# Altium PCB Atomizer_medical.PCBDOC
Units mil, origin at the board's own origin, x right, y up, seen from the top; angles counter-clockwise.
Board outline 984.71 x 2243.02 mil, 4 copper layers (Top, Inner Layer 2, Inner Layer 3, Bottom), stack 35.4 mil thick; 118 components, 59 nets, 280 pads, 170 vias.
Unrouted connection lines stored in the file: 55.
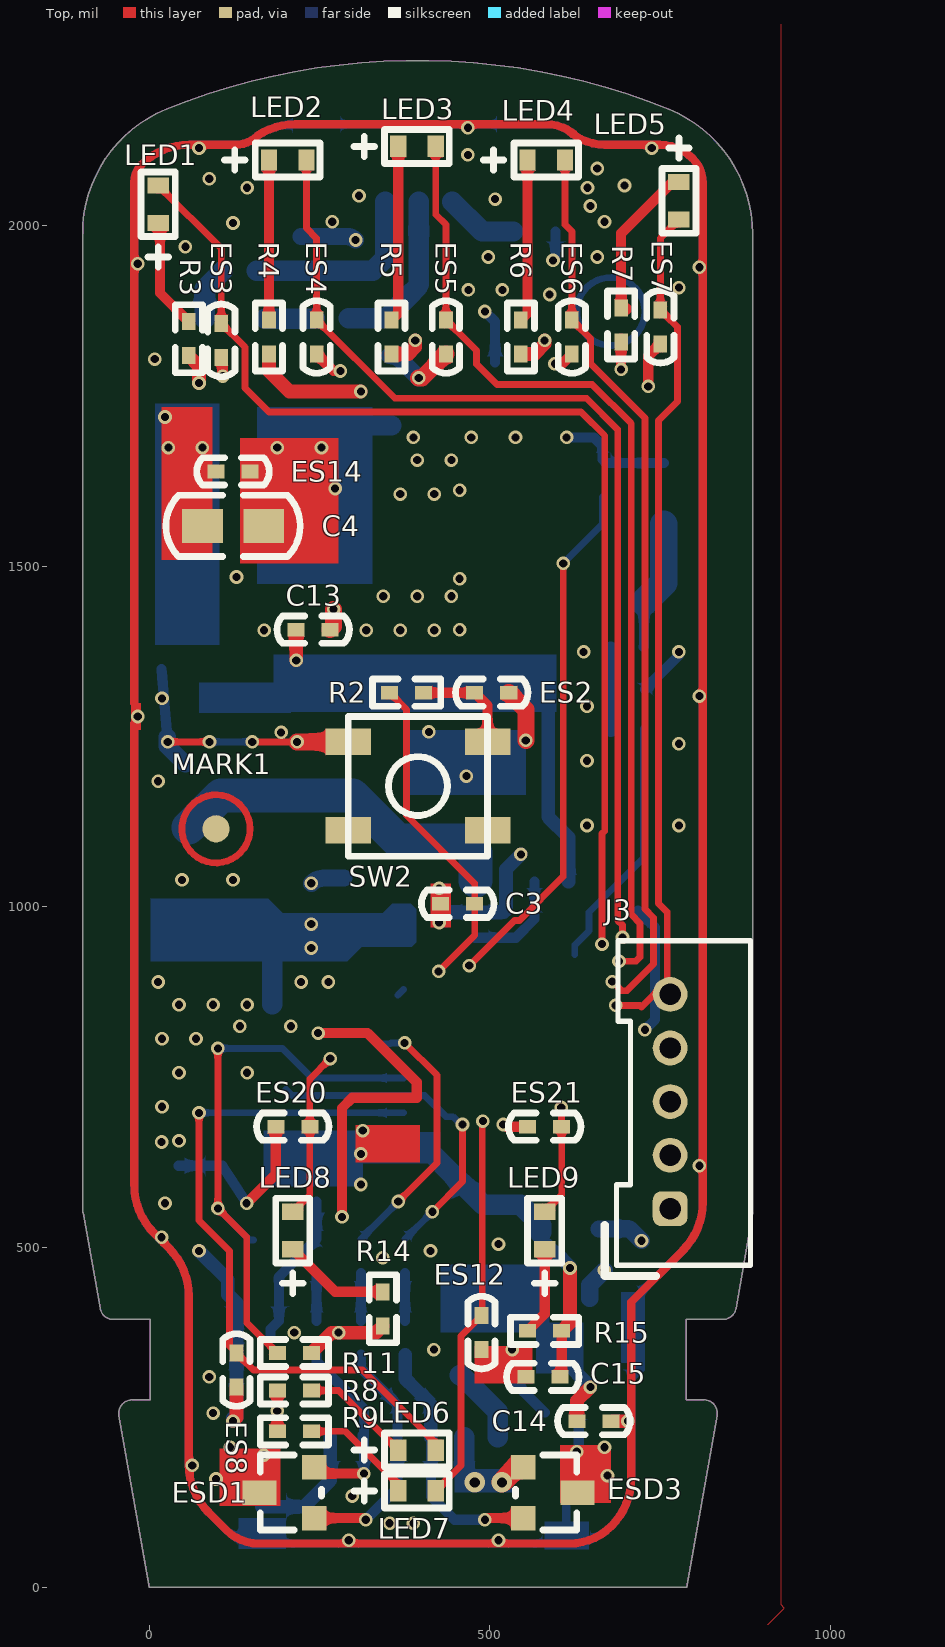
[diagram p0: Top view]
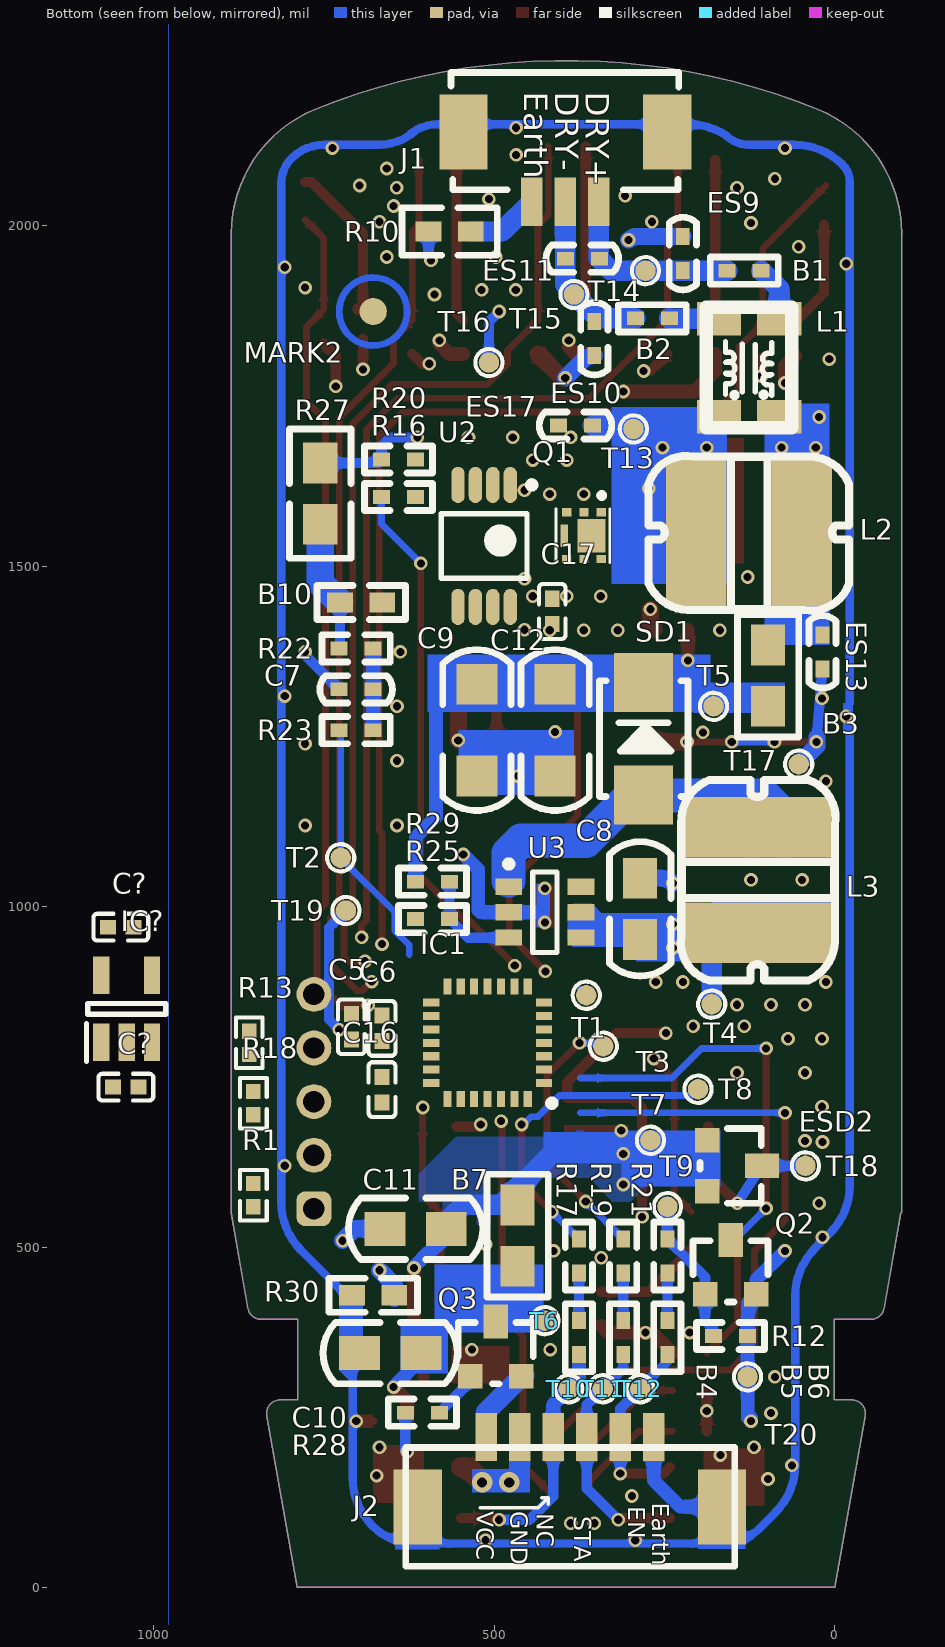
[diagram p1: Bottom view, seen from below]
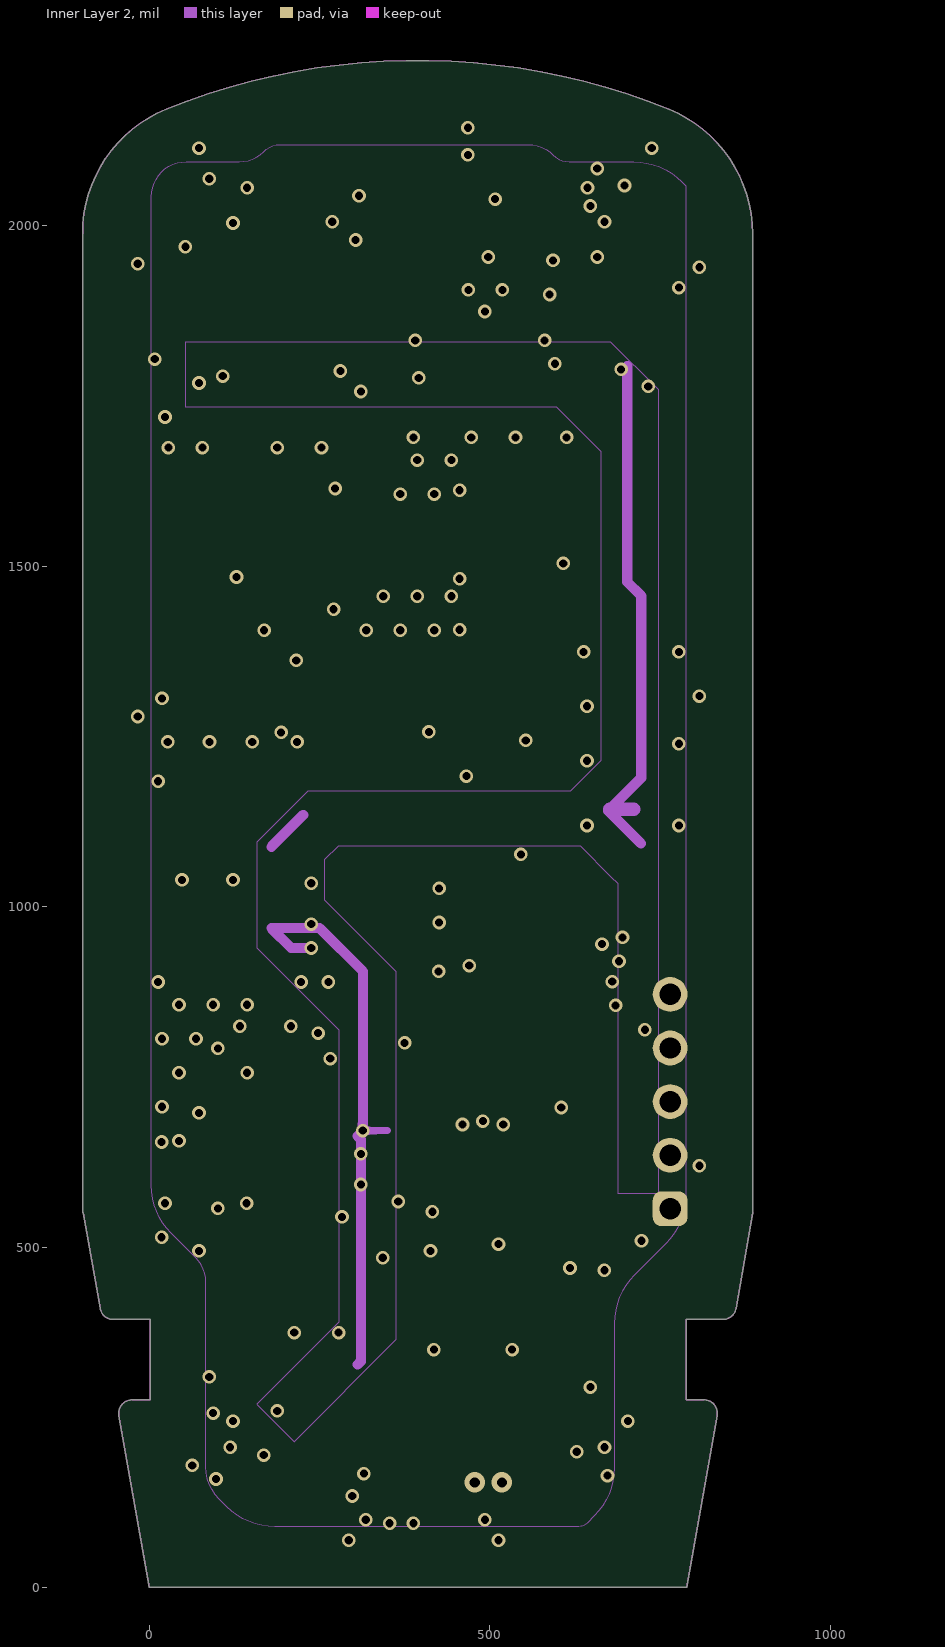
[diagram p2: Inner Layer 2]
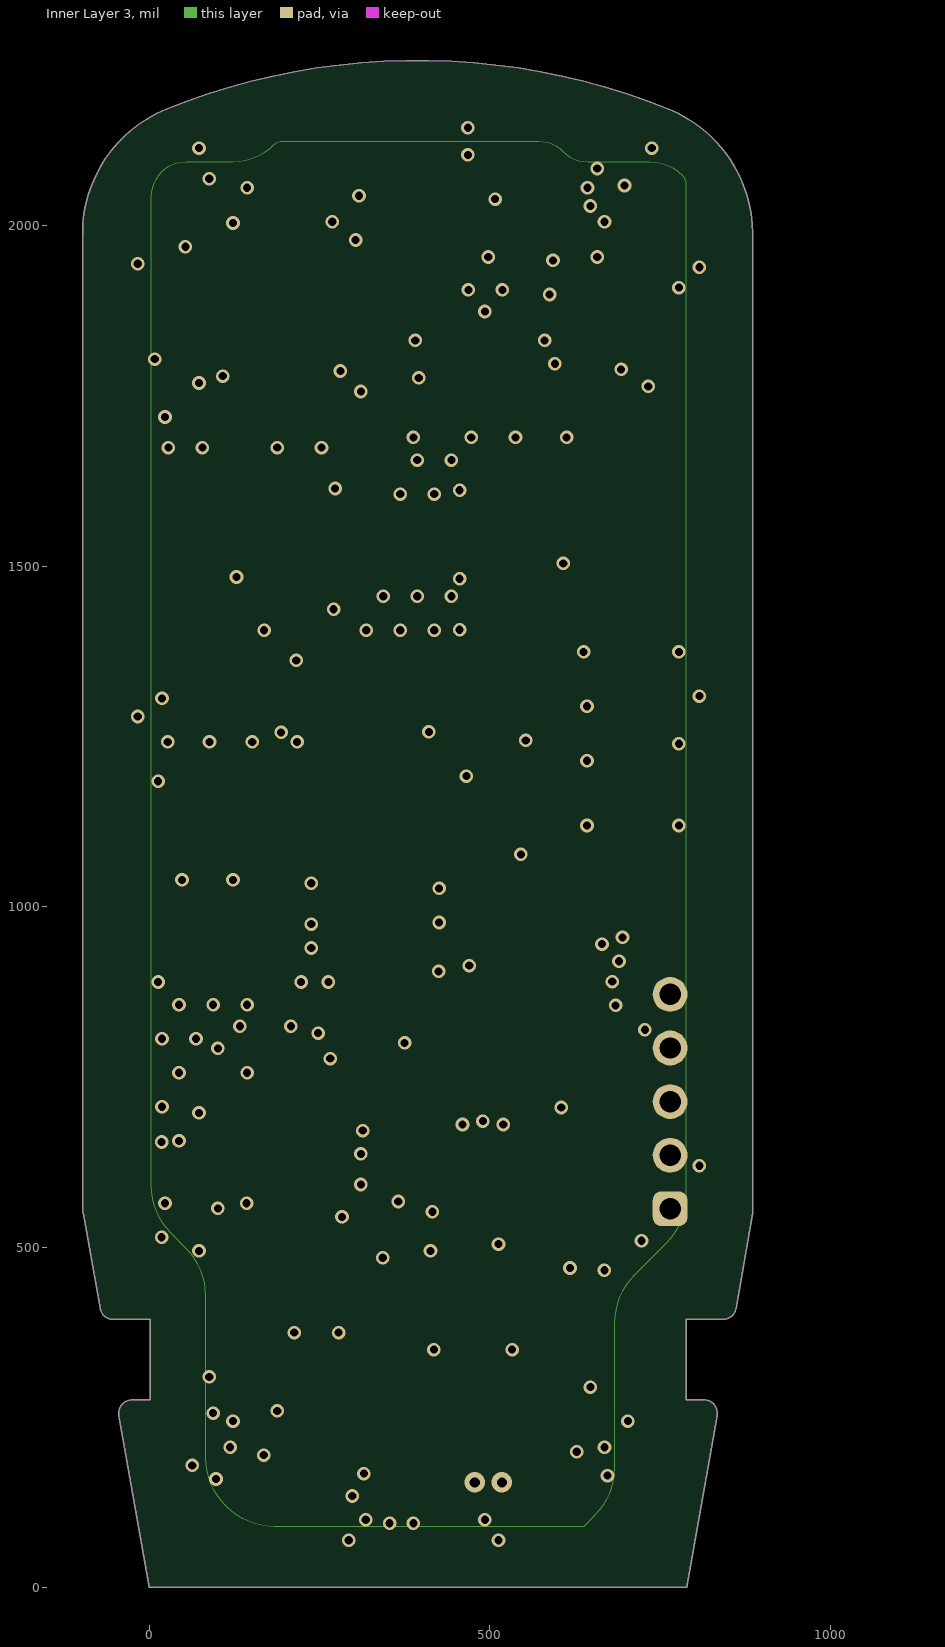
[diagram p3: Inner Layer 3]

## Layer stack, top to bottom
Solder Mask Top: solder mask 0.4, Solder Resist, Dk 3.5
Top: signal copper 1.35
Dielectric1: dielectric 10, FR-4, Dk 4.3
Inner Layer 2: signal copper 1.35
Dielectric2: dielectric 10, FR-4, Dk 4.3
Inner Layer 3: signal copper 1.35
Dielectric3: dielectric 10, FR-4, Dk 4.3
Bottom: signal copper 1.35
Solder Mask Bottom: solder mask 0.4, Solder Resist, Dk 3.5

## Board outline
0,0 -44.61,252.49 cw(c-25.23,255.91) -25.23,275.59 1.05,275.59 1.05,393.7 -52.99,393.7 cw(c-52.99,413.39) -72.38,409.97 -97.08,550.06 -98.13,551.11 -98.13,1988.85 cw(c98.72,1988.85) 24.9,2171.34 cw(c393.99,1258.91) 763.09,2171.34 cw(c689.27,1988.85) 886.12,1988.85 886.12,550.69 886.58,550.03 861.88,409.97 cw(c842.49,413.39) 842.49,393.7 788.45,393.7 788.45,275.59 814.73,275.59 cw(c814.73,255.91) 834.11,252.49 789.54,0

## Design rules (kind name [scope] priority, off if disabled: settings)
Clearance Clearance_polygon [InPolygon] p1: gap=15 ignorepadtopadclearanceinfootprint=TRUE
Clearance Clearance_all [All] p2: gap=9 ignorepadtopadclearanceinfootprint=TRUE
ComponentClearance "'Default' PADS rule_12" [All] p1: gap=0 collisioncheckmode=3 verticalgap=0 showdistances=FALSE
FlightTimeFalling "'Default' PADS rule_10" [All] p1: maximum=10.00
FlightTimeRising "'Default' PADS rule_9" [All] p1: maximum=10.00
Length "'Default' PADS rule_5" [All] p1: maxlimit=50000 minlimit=0
MatchedLengths "'Default' PADS rule_11" [InNetClass('All Nets')] p1: tolerance=200 checknetsindiffpair=TRUE checkdiffpairvsdiffpair=FALSE checkxsignals=FALSE checkothers=FALSE
MaxMinImpedance "'Default' PADS rule_8" [All] p1: minimum=50.00 maximum=150.0
MinimumSolderMaskSliver [All] p1: minsoldermaskwidth=0
ParallelSegment "'Default' PADS rule_7" [All] p1: limit=1000 gap=200
ParallelSegment "'Default' PADS rule_6" [All] p2: limit=1000 gap=200
PlaneClearance "'Default' PADS rule_14" [All] p1: clearance=13
PlaneConnect "Power Plane Connect Style - from global settings" [All] p1: planeconnectstyle=Relief reliefexpansion=20 reliefentries=2 reliefconductorwidth=15 reliefairgap=10
PolygonConnect PolygonConnect_via [IsVia] p1: connectstyle=Direct reliefconductorwidth=10 reliefentries=4 polygonreliefangle="90 Angle" airgapwidth=10
PolygonConnect [All] p2: connectstyle=Relief reliefconductorwidth=10 reliefentries=4 polygonreliefangle="90 Angle" airgapwidth=15
RoomDefinition Atomizer_medical [InComponentClass('Atomizer_medical')] p1: confinementstyle=ConfineIn formatcopy=TRUE lockcomponents=FALSE outline -9531.36,-10943.94 -7531.36,-10943.94 -7531.36,-9943.94 -9531.36,-9943.94
RoutingCorners [All] p1: cornerstyle=45-Degree minsetback=10 maxsetback=100
RoutingLayers "'Default' PADS rule_3" [All] p1: top layer_v5=TRUE mid layer 1_v5=TRUE mid layer 2_v5=TRUE bottom layer_v5=TRUE
RoutingPriority "'Default' PADS rule_2" [All] p1: routingpriority=3
RoutingTopology "'Default' PADS rule" [All] p1: topology=Shortest
RoutingVias "'Default' PADS rule_4" [All] p1: holewidth=12 width=20 viastyle="Through Hole" minholewidth=12 minwidth=20 maxholewidth=35 maxwidth=80
SMDToCorner "'Default' PADS rule_16" [All] p1: distance=0
SMDToPlane "'Default' PADS rule_17" [All] p1: distance=0
SilkToSilkClearance [All] p1: silktosilkclearance=0
SilkToSolderMaskClearance SilkscreenOverComponentPads [IsPad] p1: minsilkscreentomaskgap=0 clearancetoexposedcopper=TRUE
SolderMaskExpansion "Solder Mask Expansion from CAM settings" [All] p1: expansion=5 istentingtop=FALSE
SupplyNets "Schematic Supply Nets_8" [InNet('VCC')] p1: voltage=0.000
SupplyNets "Schematic Supply Nets_7" [InNet('VCC15V0_DRV')] p2: voltage=0.000
SupplyNets "Schematic Supply Nets_6" [InNet('3V3')] p3: voltage=0.000
SupplyNets "Schematic Supply Nets_5" [InNet('5V')] p4: voltage=0.000
SupplyNets "Schematic Supply Nets_4" [InNet('VCC3V3_MCU')] p5: voltage=0.000
SupplyNets "Schematic Supply Nets_2" [InNet('GND')] p6: voltage=0.000
SupplyNets "Schematic Supply Nets_1" [InNet('GND_S')] p7: voltage=0.000
Width "'Default' PADS rule_13" [All] p1: maxlimit=100 minlimit=10 preferedwidth=10
20 further rules are at their usual default settings.

## Components (designator, comment, footprint, x,y, rotation, side; value= is the part's Value field where it differs from the comment)
B1 "220Ohm@100MHz" 0402-B 107.97,1934.37 r0 bottom value=10uH
B2 "220Ohm@100MHz" 0402-B 242.97,1864.37 r0 bottom value=10uH
B3 "1K±25%@100MHz" 0805-B 97.97,1294.37 r90 bottom value=10uH
B4 "220Ohm@100MHz" 0402-B 375.73,341.89 r90 bottom value=10uH
B5 "220Ohm@100MHz" 0402-B 310.73,341.89 r90 bottom value=10uH
B6 "220Ohm@100MHz" 0402-B 245.73,341.89 r90 bottom value=10uH
B7 "1K±25%@100MHz" 0805-B 465.73,471.89 r90 bottom value=10uH
B10 "1K±25%@100MHz" 0603 695.73,1446.89 r180 bottom value=1K
C3 "100nF/50V" 0402-C 427.97,1004.37 r0 top value=100pF
C4 "100pF/100V" 0805-C 77.97,1559.37 r0 top value=100pF
C5 "4.7uF ±10% 10V X5R" C0402 710,805 r90 bottom
C6 "100nF ±10% 50V X7R" C0402 665,802.6 r90 bottom
C7 "1uF/10V" 0402-C 677.97,1319.37 r0 bottom value=100pF
C8 "22uF/16V" 0805-C 285.73,951.89 r90 bottom value=100pF
C9 "22uF/25V" 1206-C 525.73,1326.89 r270 bottom value=100pF
C10 "22uF/16V" 0805-C 607.97,344.37 r0 bottom value=100pF
C11 "22uF/16V" 0805-C 570.73,526.89 r0 bottom value=100pF
C12 "22uF/25V" 1206-C 410.73,1326.89 r270 bottom value=100pF
C13 "100nF/50V" 0402-C 215.73,1406.89 r0 top value=100pF
C14 "100nF/50V" 0402-C 627.97,244.37 r0 top value=100pF
C15 "100nF/50V" 0402-C 602.97,309.37 r180 top value=100pF
C16 "100nF ±10% 50V X7R" C0402 665,712.6 r90 bottom
C17 "100nF ±10% 50V X7R" C0402 415,1452.4 r270 bottom
C? "1uF ±10% 25V X5R" C0402 1022.6,735 r0 bottom
C? "1uF ±10% 25V X5R" C0402 1030,970 r0 bottom
ES2 "NC" 0402-C 477.97,1314.37 r0 top value=100pF
ES3 "NC" 0402-C 105.73,1806.89 r90 top value=100pF
ES4 "NC" 0402-C 245.73,1811.89 r90 top value=100pF
ES5 "NC" 0402-C 435.73,1811.89 r90 top value=100pF
ES6 "NC" 0402-C 620.73,1811.89 r90 top value=100pF
ES7 "NC" 0402-C 750.73,1826.89 r90 top value=100pF
ES8 "NC" 0402-C 127.97,294.37 r90 top value=100pF
ES9 "NC" 0402-C 222.97,1984.37 r270 bottom value=100pF
ES10 "NC" 0402-C 352.97,1859.37 r270 bottom value=100pF
ES11 "NC" 0402-C 345.73,1951.89 r0 bottom value=100pF
ES12 "NC" 0402-C 487.97,349.37 r90 top value=100pF
ES13 "NC" 0402-C 17.97,1349.37 r90 bottom value=100pF
ES14 "NC" 0402-C 97.97,1639.37 r0 top value=100pF
ES17 "NC" 0402-C 355.73,1706.89 r0 bottom value=100pF
ES20 "NC" 0402-C 185.73,676.89 r0 top value=100pF
ES21 "NC" 0402-C 555.73,676.89 r0 top value=100pF
ESD1 "PESD5V2S2UT" SOT23 202.97,139.37 r90 top
ESD2 "PESD5V2S2UT" SOT23 147.97,619.37 r270 bottom
ESD3 "PESD5V2S2UT" SOT23 587.97,139.37 r270 top
IC1 "STM32C031G6U6" QFN50P400X400X60-28N-D 510,800 r0 bottom
IC? "ME6211C33M5G-N" SOT95P270X145-5N 1040,850 r90 bottom
J1 "1.25T-3PWT" WAFER_1.25MMX3P_180 395.73,2086.89 r0 bottom locked
J2 "1.25T-6PWT" WAFER_1.25MMX6P_180 388.96,118.53 r180 bottom locked
J3 "JST_PH 2.00-5" "JST_PH 2.00-5" 765,556.26 r90 top
L1 "22uH@100kHz/50V 1812" LINEFILTER 125.73,1791.89 r90 bottom
L2 "470uH/260mA" SP0502 125.73,1549.13 r180 bottom value=10uH
L3 "10uH/2.5A" SP0502 112.97,1039.37 r90 bottom value=10uH
LED1 "LED_BLUE" LED0603 12.97,2004.37 r90 top
LED2 "LED_BLUE" LED0603 175.62,2096.89 r0 top
LED3 "LED_BLUE" LED0603 365.62,2116.89 r0 top locked
LED4 "LED_BLUE" LED0603 555.62,2096.89 r0 top locked
LED5 "LED_BLUE" LED0603 777.97,2064.37 r270 top
LED6 "LED_RED" LED0603 365.62,201.89 r0 top locked
LED7 "LED_GREEN" LED0603 365.62,141.89 r0 top locked
LED8 "LED_BLUE" LED0603 210.73,496.77 r90 top locked
LED9 "LED_BLUE" LED0603 580.73,496.77 r90 top locked
MARK1 "MARK_POINT" MARK_POINT 97.97,1114.37 r90 top
MARK2 "MARK_POINT" MARK_POINT 677.97,1874.37 r90 bottom
Q1 "IRL100HS121" IRL100HS121 370,1545 r0 bottom
Q2 "MMBT3904" SOT23 152.97,469.37 r180 bottom
Q3 "AO3401" SOT23 497.97,349.37 r180 bottom
R1 "10KΩ ±1% 62.5mW" R0402 853.94,576.36 r270 bottom
R2 "NC" 0402 377.97,1314.37 r180 top value=4.7K
R3 "220/1%" 0402 57.97,1834.37 r90 top value=1K
R4 "220/1%" 0402 175.73,1836.89 r90 top value=1K
R5 "220/1%" 0402 355.73,1836.89 r90 top value=1K
R6 "220/1%" 0402 545.73,1836.89 r90 top value=1K
R7 "220/1%" 0402 692.97,1854.37 r90 top value=1K
R8 "220/1%" 0402 212.97,289.37 r0 top value=1K
R9 "220/1%" 0402 212.97,229.37 r0 top value=1K
R10 "0/1%" 0603 565.73,1991.89 r0 bottom value=0
R11 "4.7K/1%" 0402 212.97,344.37 r0 top value=1K
R12 "220K/1%" 0402 152.97,369.37 r0 bottom value=1K
R13 "10KΩ ±1% 62.5mW" R0402 860,800 r270 bottom
R14 "220/1%" 0402 342.97,409.37 r90 top value=1K
R15 "220/1%" 0402 580.73,376.89 r180 top value=1K
R16 "30/1%" 0402 640.73,1601.89 r180 bottom value=1K
R17 "47/1%" 0402 375.73,486.89 r270 bottom value=1K
R18 "10KΩ ±1% 62.5mW" R0402 853.94,711.36 r270 bottom
R19 "47/1%" 0402 310.73,486.89 r270 bottom value=1K
R20 "220K/1%" 0402 640.73,1656.89 r180 bottom value=1K
R21 "47/1%" 0402 245.73,486.89 r270 bottom value=1K
R22 "10K/1%" 0402 702.97,1379.37 r0 bottom value=1K
R23 "1K/1%" 0402 702.97,1259.37 r180 bottom value=1K
R25 "10K/1%" 0402 590.73,981.89 r0 bottom value=1K
R27 "1r/1%" 0805 755.73,1606.89 r270 bottom value=1K
R28 "10K/1%" 0402 605.73,256.89 r180 bottom value=1K
R29 "220K/1%" 0402 590.73,1036.89 r0 bottom value=1K
R30 "0/1%" 0603 677.97,429.37 r0 bottom value=0
SD1 "SS24" SMA-403D 280.73,1246.89 r270 bottom
SW2 "NC" HTS-52MB 394.55,1177.25 r0 top
T1 "PWM" TP-SIP-1-Small1 365,870 r180 bottom
T2 "CT_AD" TP-SIP-1-Small1 725.73,1071.89 r180 bottom
T3 "STA" TP-SIP-1-Small1 340,795 r180 bottom
T4 "+5V" TP-SIP-1-Small1 180.73,856.89 r180 bottom
T5 "15VDC" TP-SIP-1-Small1 177.97,1294.37 r180 bottom
T6 "VIN" TP-SIP-1-Small1 425.73,391.89 r180 bottom
T7 "VCC" TP-SIP-1-Small1 270.73,656.89 r180 bottom
T8 "PlugInCheck" TP-SIP-1-Small1 200.73,731.89 r180 bottom
T9 "EN_FOG" TP-SIP-1-Small1 245.73,559.37 r180 bottom
T10 "Dev_NC" TP-SIP-1-Small1 390.73,291.89 r90 bottom
T11 "NebSt" TP-SIP-1-Small1 340.73,291.89 r90 bottom
T12 "EN_Fog" TP-SIP-1-Small1 285.73,291.89 r90 bottom
T13 "DRY" TP-SIP-1-Small1 295.73,1701.89 r90 bottom
T14 "P+" TP-SIP-1-Small1 277.97,1934.37 r90 bottom
T15 "P-" TP-SIP-1-Small1 382.97,1899.37 r90 bottom
T16 "GND" TP-SIP-1-Small1 507.97,1799.37 r90 bottom
T17 "GND" TP-SIP-1-Small1 52.97,1209.37 r90 bottom
T18 "GND" TP-SIP-1-Small1 42.97,619.37 r90 bottom
T19 "GND" TP-SIP-1-Small1 717.97,994.37 r90 bottom
T20 "GND" TP-SIP-1-Small1 127.97,309.37 r90 bottom
U2 "AD8418ABRMZ" TSOP65P490X95-8N 515,1530 r270 bottom value=CMVR=70V
U3 "MT3608" SOT95P280X110-6N 425.73,991.89 r180 bottom

## Footprints (in the part's own frame and the unit in brackets; to place one, negate y for a bottom-side part, rotate by r counter-clockwise, add the part's x,y. Pads: shape width x height; smd on the part's side, far side on the other; paste and mask are expansions set on the pad)
0402 [mil]
  rect 25x20 smd: 1(-25,0) 2(25,0)
  silkscreen extent -50,-20 50,20
0402-B [mil] "BEAD-0402"
  rect 25x20 smd: 1(0,0) 2(50,0)
  silkscreen extent -25,-20 75,20
0402-C [mil] "CAP-0402"
  rect 25x20 smd: 1(0,0) 2(50,0)
  silkscreen extent -28,-20 78,20
0603 [mil]
  rect 38x30 smd: 1(-31,0) 2(31,0)
  silkscreen extent -65,-25 65,25
0805 [mil]
  rect 60x50 smd: 1(-45,0) 2(45,0)
  silkscreen extent -95,-45 95,45
0805-B [mil] "BEAD"
  rect 60x50 smd: 1(0,0) 2(90,0)
  silkscreen extent -45,-45 135,45
0805-C [mil] "CAP-0805"
  rect 60x50 smd: 1(0,0) 2(90,0)
  silkscreen extent -54,-45 144,45
1206-C [mil] "CAP-1206"
  rect 60x60 smd: 1(0,0) 2(135,0)
  silkscreen extent -51,-50 186,50
C0402 [mm]
  rect 0.6x0.55 smd paste-100 mask+0.051: 1(0,0) 2(0.95,0)
  silkscreen extent -0.55,-0.5 1.5,0.5, body extent -0.02,-0.25 0.98,0.25, height 0.5
HTS-52MB [mm]
  rect 1.7x1 smd: 1(-2.6,1.65) 2(2.6,1.65) 3(-2.6,-1.65) 4(2.6,-1.65)
  silkscreen extent -2.6,-2.62 2.6,2.59
IRL100HS121 [mm]
  rect 0.35x0.3 smd: 1(-0.692,-0.875) 2(-0.043,-0.875) 3(0.607,-0.875) 4(0.607,0.875) 5(-0.043,0.875) 6(-0.692,0.875)
  rect 0.28x0.83 smd: 7(0.693,0.005)
  rect 1.05x1.25 smd: 8(-0.322,0.005)
  silkscreen extent -1,-1.6 1,1, body extent -1,-1 1,1, height 1.1
"JST_PH 2.00-5" [mm]
  rrect50% 1.3x1.3 hole 0.8: 1(0,0)
  round 1.3 hole 0.8: 2(2,0) 3(4,0) 4(6,0) 5(8,0)
  silkscreen extent -2.51,-3 10,2.44, body extent -1.95,-2.8 9.95,1.7, height 6
LED0603 [mm] "LED"
  rect 0.6x0.8 smd: 1(0,0) 2(1.4,0)
  silkscreen extent -1.65,-0.64 1.91,0.64
LINEFILTER [mm]
  rect 1.25x1.65 smd: 1(-1.825,-1.125) 2(1.825,-1.125) 3(1.825,1.125) 4(-1.825,1.125)
  silkscreen extent -2.25,-1.58 2.25,1.59
MARK_POINT [mil] "MARK"
  round 40 smd: 0(0,0)
  Top circle w10: c0,0 r50
QFN50P400X400X60-28N-D [mm]
  rect 0.6x0.3 smd: 1(-2.1,1.5) 2(-2.1,1) 3(-2.1,0.5) 4(-2.1,0) 5(-2.1,-0.5) 6(-2.1,-1) 7(-2.1,-1.5) 15(2.1,-1.5) 16(2.1,-1) 17(2.1,-0.5) 18(2.1,0) 19(2.1,0.5) 20(2.1,1) 21(2.1,1.5)
  rect 0.3x0.6 smd: 8(-1.5,-2.1) 9(-1,-2.1) 10(-0.5,-2.1) 11(0,-2.1) 12(0.5,-2.1) 13(1,-2.1) 14(1.5,-2.1) 22(1.5,2.1) 23(1,2.1) 24(0.5,2.1) 25(0,2.1) 26(-0.5,2.1) 27(-1,2.1) 28(-1.5,2.1)
  silkscreen extent -2.52,2.13 -2.27,2.37, body extent -2,-2 2,2, height 0.6
R0402 [mm]
  rect 0.566x0.54 smd mask+0.051: 1(-0.433,0) 2(0.433,0)
  silkscreen extent -0.94,-0.5 0.94,0.5, body extent -0.5,-0.25 0.5,0.25, height 0.5
SMA-403D [mm]
  rect 2.2x2.2 smd: 1(2.1,0) 2(-2.1,0)
  silkscreen extent -2.16,-1.65 2.16,1.65
SOT23 [mil]
  rect 36x36 smd: 1(-37.5,-39) 2(37.5,-39)
  rect 36x50 smd: 3(0,41)
  silkscreen extent -55,-50 55,40
SOT95P270X145-5N [mm]
  rect 1.4x0.6 smd: 1(-1.25,0.95) 2(-1.25,0) 3(-1.25,-0.95) 4(1.25,-0.95) 5(1.25,0.95)
  silkscreen extent -1.95,-1.45 0.2,1.5, body extent -1.35,-1.45 1.35,1.45, height 1.45
SOT95P280X110-6N [mm] "SOT23, 6-Leads, Body 2.90x2.80mm, Pitch 0.95mm, IPC Medium Density"
  rect 1x0.6 smd: 1(-1.35,0.95) 2(-1.35,0) 3(-1.35,-0.95) 4(1.35,-0.95) 5(1.35,0) 6(1.35,0.95)
  silkscreen extent -1.48,-1.5 0.45,1.92, body extent -0.85,-1.5 0.85,1.5, height 1.1
SP0502 [mm]
  rect 2.25x5.5 smd: 1(-1.975,0) 2(1.975,0)
  silkscreen extent -3.75,-2.9 3.73,2.87
TP-SIP-1-Small1 [mil] "test point"
  round 30 smd: 1(0,0)
  silkscreen extent -20,-20 20,20
TSOP65P490X95-8N [mm] "TSOP, 8-Leads, Body 3.00x3.00mm, Pitch 0.65mm, IPC Medium Density"
  oval 1.35x0.5 smd: 1(-2.275,0.975) 2(-2.275,0.325) 3(-2.275,-0.325) 4(-2.275,-0.975) 5(2.275,-0.975) 6(2.275,-0.325) 7(2.275,0.325) 8(2.275,0.975)
  silkscreen extent -2.4,-1.6 1.2,1.9, body extent -2.45,-1.6 2.45,1.6, height 0.95
WAFER_1.25MMX3P_180 [mm] "1.25T-3PWT"
  rect 0.8x1.8 smd: 1(-1.25,1.3) 2(0,1.3) 3(1.25,1.3)
  rect 1.8x2.8 smd: 4(3.8,-1.3) 5(-3.8,-1.3)
  silkscreen extent -4.23,-3.52 4.26,0.86
WAFER_1.25MMX6P_180 [mm]
  rect 0.8x1.8 smd: 1(-3.125,2.6) 2(-1.875,2.6) 3(-0.625,2.6) 4(0.625,2.6) 5(1.875,2.6) 6(3.125,2.6)
  rect 1.8x2.8 smd: 7(-5.675,0) 8(5.675,0)
  silkscreen extent -6.13,-2.22 6.15,2.21

## Part data
B1 B2 B3 B4 B5 B6 B7 L2 L3: library part Inductor, "Inductor", Code_IEC=1005, Code_JEITA=0402, LatestRevisionDate=29-May-2009, LatestRevisionNote="IPC-7351 Footprint Added.", PackageDescription="Chip Inductor", PackageReference=0402-A, Published=8-Jun-2000, Publisher="Altium Limited"
B10 R2 R3 R4 R5 R6 R7 R8 R9 R10 R11 R12 R14 R15 R16 R17 R19 R20 R21 R22 R23 R25 R27 R28 R29 R30: library part Res3, "Resistor", LatestRevisionDate=29-May-2009, LatestRevisionNote="IPC-7351 Footprint Added.", PackageDescription="Chip Resistor", PackageReference=J1-0603, Published=8-Jun-2000, Publisher="Altium Limited"
C3 C4 C7 C13 C14 C15 ES2 ES3 ES4 ES5 ES6 ES7 ES8 ES9 ES10 ES11 ES12 ES13 ES14 ES17 ES20 ES21: library part "Cap Semi", "Capacitor (Semiconductor SIM Model)", LatestRevisionDate=29-May-2009, LatestRevisionNote="IPC-7351 Footprint Added.", PackageDescription="Chip Capacitor", PackageReference=C1206, Published=8-Jun-2000, Publisher="Altium Limited"
C5 C? C?: library part Cap, "CL05A475KP5NRNC", LatestRevisionDate=17-Jul-2002, LatestRevisionNote="Re-released for DXP Platform.", PackageDescription="Radial Cap, Thru-Hole; 2 Leads; 0.3 in Pin Spacing", PackageReference=RAD-0.3, Published=8-Jun-2000, Publisher="Altium Limited"
C6 C16 C17: library part Cap, "Capacitor", LatestRevisionDate=17-Jul-2002, LatestRevisionNote="Re-released for DXP Platform.", PackageDescription="Radial Cap, Thru-Hole; 2 Leads; 0.3 in Pin Spacing", PackageReference=RAD-0.3, Published=8-Jun-2000, Publisher="Altium Limited"
C8 C9 C10 C11 C12: library part Cap2, "Capacitor", PackageDescription="Capacitor; 2 Leads", PackageReference=CAPR5-4X5, Published=23-Sep-2002, Publisher="Altium Limited"
ESD1 ESD2 ESD3: library part ESD, "ESD"
IC1: "Integrated Circuit", Manufacturer_Name=STMicroelectronics, Mouser Part Number=511-STM32C031G6U6, Datasheet Link=https://www.st.com/resource/en/datasheet/stm32c031c4.pdf, Height=0.6mm, Manufacturer_Part_Number=STM32C031G6U6, Mouser Price/Stock=https://www.mouser.co.uk/ProductDetail/STMicroelectronics/STM32C031G6U6?qs=IPgv5n7u5QZqRf3nOTChhw%3D%3D
IC?: "Integrated Circuit", Manufacturer_Name=Microne, Datasheet Link=https://datasheet.lcsc.com/szlcsc/1811131510_MICRONE-Nanjing-Micro-One-Elec-ME6211C33M5G-N_C82942.pdf, Height=1.45mm, Manufacturer_Part_Number=ME6211C33M5G-N
J1: library part "Header 5", "Header, 5-Pin", LatestRevisionDate=17-Jul-2002, LatestRevisionNote="Re-released for DXP Platform.", Publisher="Altium Limited"
J2: library part "Header 8", "Header, 8-Pin", LatestRevisionDate=17-Jul-2002, LatestRevisionNote="Re-released for DXP Platform.", Publisher="Altium Limited"
J3: "品牌：JST 型号：B5B-PH-K-S，直插，间距2.00，5pin", 制造商=JST, 名称=插座2针，2.0间距, 物料编号=B5B-PH-K-S
L1: library part Inductor_common, "Inductor_common"
LED1 LED2 LED3 LED4 LED5 LED6 LED7 LED8 LED9: library part LED2, "Typical RED, GREEN, YELLOW, AMBER GaAs LED", LatestRevisionDate=17-Jul-2002, LatestRevisionNote="Re-released for DXP Platform.", PackageDescription="SM LED; 2 Flat Leads", PackageReference=3.2X1.6X1.1, PackageVersion=Feb-2002, Published=8-Jun-2000, Publisher="Altium Limited"
Q1: "MOSFET (N-Channel)", Manufacturer_Name=Infineon, Mouser Part Number=726-IRL100HS121, Arrow Part Number=IRL100HS121, Arrow Price/Stock=https://www.arrow.com/en/products/irl100hs121/infineon-technologies-ag, Datasheet Link=https://www.infineon.com/dgdl/Infineon-IRL100HS121-DS-v02_01-EN.pdf?fileId=5546d46259d9a4bf015a4b31f85e118e, Height=1mm, Manufacturer_Part_Number=IRL100HS121, Mouser Price/Stock=https://www.mouser.co.uk/ProductDetail/Infineon-Technologies/IRL100HS121?qs=xhbEVWpZdWcNYRrtYstvBg%3D%3D
Q2: library part NPN, "NPN Bipolar Transistor", Code_JEDEC=TO-226-AA, LatestRevisionDate=17-Jul-2002, LatestRevisionNote="Re-released for DXP Platform.", PackageDescription="TO, Flat Index; 3 In-Line, Axial Leads; Body Dia. 4.8mm; Leads 0.55 x 0.51 mm (max)", PackageReference=TO-226-AA, Published=8-Jun-2000, Publisher="Altium Limited"
Q3: library part MOSFET-P, "P-Channel MOSFET", LatestRevisionDate=17-Jul-2002, LatestRevisionNote="Re-released for DXP Platform.", PackageDescription="TO, Flat Index; 3 In-Line, Axial Leads; Body Dia. 4.6mm; Lead Dia. 0.5 mm (max)", PackageReference=E3, PackageVersion=1995/1996, Published=8-Jun-2000, Publisher="Altium Limited"
R1 R13 R18: library part R-0603
SD1: library part "D Schottky", "Schottky Diode", Code_JEDEC=DO-214-AA, LatestRevisionDate=17-Jul-2002, LatestRevisionNote="Re-released for DXP Platform.", PackageDescription="DO-214-AA/SMB; 2 C-Bend Leads; Body 5.3 x 3.6 mm, inc. leads (LxW)", PackageReference=SMB, Published=8-Jun-2000, Publisher="Altium Limited"
SW2: library part SW-PB, "Switch", LatestRevisionDate=17-Jul-2002, LatestRevisionNote="Re-released for DXP Platform.", PackageDescription="Switch; 2 Leads", PackageReference=SPST-2, Published=24-Mar-1999, Publisher="Altium Limited"
T1 T2 T3 T4 T5 T6 T7 T8 T9 T10 T11 T12 T13 T14 T15 T16 T17 T18 T19 T20: library part TP-SIP-1-Small
U2: library part AD8418, "品牌：ADI，型号：AD8418ABRMZ，ROHS", Manufacturer="Analog Devices", HelpURL=http://www.analog.com/media/en/technical-documentation/data-sheets/AD8418A.pdf, Id=50496, Part Number=AD8418ABRMZ, Type=DIFAMP
U3: "DC-DC-BOOST"

## Via types
v1: diameter 20, hole 12, Top to Bottom, tented both sides, 168 vias
v2: diameter 30, hole 15, Top to Bottom, tented both sides, 2 vias

## Nets (pads, with @x,y where several pads share a name; then routed paths per layer and width w, separated by ;. In a path a pad name is that pad's centre, name@x,y a point inside that pad or via, vN(x,y) a via of type N, cw(c..) or ccw(c..) an arc to the next point about the centre after c; other vN are vias at no path point)
3V3: J3.1 R13.2 R18.2
5V: C17.1 U2.6 U2.7
CT_AD: IC1.14 R23.1 T2.1 | length 373.6
  Bottom w10: 625,930 625,943.91 645.73,964.64 645.73,991.89 T2.1 R23.1@725.73,1261.89
DEV_NC: B4.1 ESD3.2 J2.3 T10.1 | length 370.8
  Top w15: v1@495.47,101.87 ESD3.2
  Bottom w15: J2.3 413.56,134.06 448.25,99.37 v1(492.97,99.37)
  Bottom w20: B4.1 375.73,306.89 T10.1 413.56,269.06 J2.3
EN_FOG: B6.1 ESD1.2 J2.5 T12.1 | length 305.1
  Top w15: ESD1.2 251.64,167.21 v1(315.14,167.21)
  Bottom w15: B6.1 245.73,331.89 T12.1 315.14,262.49 J2.5@315.14,225.14 ; J2.5@313.6,201.25 313.6,223.6 J2.5@315.14,225.14 ; v1(315.14,167.21) J2.5 J2.5@315.14,225.14
Fog_EN_SET: IC1.2 Q2.3 R11.1 | length 846.2
  Top w10: v1(100.73,791.89) v1(100.73,556.89) 142.97,514.65 142.97,389.37 R11.1
  Bottom w10: v1(100.73,556.89) 147.25,510.37 Q2.3 ; v1(100.73,791.89) 195.73,791.89 239.22,748.4 373.77,748.4
GND: C3.1 C5.1 C6.1 C7.2 C8.2 C9.2 C11.2 C12.2 C13.2 C15.2 C16.1 C17.2 C?.1 ES2.2 ES3.1 ES4.1 ES5.1 ES6.1 ES7.1 ES8.1 ES9.1 ES10.2 ES12.1 ES13.1 ES17.2 ES20.1 ES21.1 ESD1.3 ESD2.3 ESD3.1 ESD3.3 IC1.4 IC?.2 J2.2 J3.3 Q2.2 R1.1 R10.2 R12.1 R20.1 R25.2 R27.1 R28.1 R30.1 SW2.1 T16.1 T17.1 T18.1 T19.1 T20.1 U2.1 U2.2 U2.3 U3.2 | length 2708.4
  Top w10: v1(26.97,1242.13) v1(88.42,1242.13) ; v1(151.16,1242.13) 193.64,1242.13 v1(217.09,1242.13)
  Top w15: ES3.1 107.97,1804.65 v1(107.97,1779.37) ; v1(142.97,564.37) 185.73,607.13 ES20.1 ; ES4.1 270.73,1786.89 v1(280.73,1786.89) ; v1(520,680) 521.35,680 524.46,676.89 ES21.1 ; v1(595.73,1797.47) 606.31,1797.47 ES6.1 ; v1(732.97,1764.37) 732.97,1809.13 ES7.1
  Top w20: v1(122.97,244.37) 127.97,249.37 ES8.1
  Top w25: v1@217.16,1242.21 SW2.1 ; C13.2 270.73,1411.89 v1(270.73,1436.89) ; v1(395.73,1776.89) 400.73,1776.89 ES5.1 ; ES2.2 552.97,1289.37 v1(552.97,1244.37)
  Top w30: v2(517.97,154.37) 540.47,176.87 ESD3.1
  Bottom w10: v1(88.42,1242.13) v1(151.16,1242.13) ; C12.2@394.83,1195.41 C12.2@419.61,1195.41 ; C9.2@509.06,1169.12 509.06,1195.41 C9.2@530.99,1195.41
  Bottom w15: ES13.1 19.02,1336.87 21.59,1306.31 v1@26.34,1249.65 ; T18.1 ESD2.3 118.76,601.37 v1(142.97,564.37) ; v1(492.97,1874.37) 507.97,1859.37 T16.1 ; v1(592.97,1949.37) 596.73,1953.13 R10.2 ; v1(612.97,1689.37) 652.97,1689.37 665.73,1676.61 R20.1 670.73,1651.89 R27.1 ; v1(627.97,199.37) 630.73,202.13 R28.1 ; T19.1 742.97,969.37 742.97,834.37 v1(727.97,819.37) ; C7.2 777.97,1369.37 v1(777.97,1374.37)
  Bottom w20: v1(72.97,494.37) 115.47,451.87 Q2.2 127.97,417.87 R12.1 T20.1 v1@127.97,249.37 ; v1(122.97,244.37) v1@122.97,249.37 ; 440.73,991.89 U3.2 520.73,991.89 523.88,995.04 523.88,1055.04 v1(545.73,1076.89)
  Bottom w25: v1@26.34,1249.65 26.34,1236 T17.1 ; ES9.1 268.64,1984.37 290.9,1984.37 cw(c290.9,1967.3) v1(302.97,1979.37) ; v1(237.97,1034.37) cw(c256.13,1016.22) 256.13,1041.89 C8.2 ; ES10.2 cw(c352.97,1784.55) 370.52,1802.1 v1(395.73,1776.89) ; R30.1@646.97,424.37 646.97,428.37 R30.1@647.47,428.87 ; R30.1 646.97,444.37 v1(668.47,465.87) ; C11.2 705.45,526.89 v1(722.97,509.37)
  Bottom w30: J2.2 462.78,169.57 v2(477.97,154.37) v2(517.97,154.37)
  other v1: 352.97,94.37 387.97,94.37 297.97,134.37 97.97,159.37 672.97,164.37 167.97,194.37 118.64,206.06 668.64,206.06 93.64,256.06 87.97,309.37 417.97,349.37 532.97,349.37 212.97,374.37 342.97,484.37 412.97,494.37 512.97,504.37 22.97,564.37 17.97,654.37 43.64,656.06 18.64,706.06 43.64,756.06 143.64,756.06 18.64,806.06 68.64,806.06 132.97,824.37 207.97,824.37 43.64,856.06 93.64,856.06 143.64,856.06 12.97,889.37 222.97,889.37 262.97,889.37 425.73,976.89 425.73,1026.89 47.97,1039.37 122.97,1039.37 642.97,1119.37 777.97,1119.37 12.97,1184.37 465.73,1191.89 642.97,1214.37 777.97,1239.37 193.64,1256.06 410.73,1256.89 642.97,1294.37 18.64,1306.06 637.97,1374.37 168.64,1406.06 318.64,1406.06 368.64,1406.06 418.64,1406.06 455.73,1406.89 343.64,1456.06 393.64,1456.06 443.64,1456.06 455.73,1481.89 127.97,1484.37 368.64,1606.06 418.64,1606.06 455.73,1611.89 393.64,1656.06 443.64,1656.06 387.97,1689.37 472.97,1689.37 537.97,1689.37 7.97,1804.37 587.97,1899.37 468.64,1906.06 518.64,1906.06 777.97,1909.37 497.97,1954.37 657.97,1954.37 52.97,1969.37 122.97,2004.37 268.64,2006.06 668.64,2006.06 647.97,2029.37 507.97,2039.37 307.97,2044.37 143.64,2056.06 643.64,2056.06 697.97,2059.37 87.97,2069.37 657.97,2084.37 467.97,2104.37
GND_S: C10.2 C14.2 J1.4 J1.5 J2.6 J2.7 J2.8 R30.2 | length 11260.6
  Top w12: -22.03,1269.37 -22.03,590.79 ccw(c77.97,590.79) 7.26,520.08 15.47,511.87 28.68,498.66 cw(c-42.03,427.95) 57.97,427.95 57.97,180.79 ccw(c157.97,180.79) 87.26,110.08 112.97,84.37 ccw(c161.26,132.65) 161.26,64.37 292.97,64.37 512.97,64.37 616.61,64.37 ccw(c616.61,152.15) 678.68,90.08 ccw(c607.97,160.79) 707.97,160.79 707.97,244.37 707.97,419.37 783.68,495.08 ccw(c712.97,565.79) 812.97,565.79 812.97,619.37 812.97,1309.37 812.97,1939.37 812.97,2063.16 ccw(c761.76,2063.16) 797.97,2099.37 ccw(c749.69,2051.09) 797.93,2099.42 ccw(c749.69,2051.09) 749.69,2119.37 737.97,2119.37 669.48,2119.37 cw(c669.48,2199.87) 633.88,2127.67 cw(c669.48,2199.87) 628.64,2130.5 ; -22.03,1299.37 -22.03,1944.37 -22.03,2065.23 cw(c12.12,2065.23) -12.03,2089.37 -11.32,2090.08 cw(c59.4,2019.37) 59.4,2119.37 72.97,2119.37 126.94,2119.37 ccw(c126.94,2164.83) 149.18,2125.18 ccw(c126.94,2164.83) 159.09,2132.69 cw(c214.4,2049.37) 214.4,2149.37 467.97,2149.37 583.08,2149.37 cw(c583.08,2084.94) 614.19,2141.36 ; C14.2 C14.2@689.47,244.37 ; 614.19,2141.36 cw(c583.08,2084.94) 628.64,2130.5 ; 614.19,2141.36 ccw(c669.48,2199.87) 628.64,2130.5
  Bottom w12: -22.03,1269.37 -22.03,590.79 ccw(c77.97,590.79) 7.26,520.08 15.47,511.87 28.68,498.66 cw(c-42.03,427.95) 57.97,427.95 57.97,180.79 ccw(c157.97,180.79) 87.26,110.08 112.97,84.37 ccw(c161.26,132.65) 161.26,64.37 292.97,64.37 512.97,64.37 616.61,64.37 ccw(c616.61,152.15) 678.68,90.08 ccw(c607.97,160.79) 707.97,160.79 707.97,244.37 707.97,419.37 783.68,495.08 ccw(c712.97,565.79) 812.97,565.79 812.97,619.37 812.97,1309.37 812.97,1939.37 812.97,2063.16 ccw(c761.76,2063.16) 797.97,2099.37 ccw(c749.69,2051.09) 797.93,2099.42 ccw(c749.69,2051.09) 749.69,2119.37 737.97,2119.37 669.48,2119.37 cw(c669.48,2199.87) 633.88,2127.67 cw(c669.48,2199.87) 628.64,2130.5 ; -22.03,1299.37 -22.03,1944.37 -22.03,2065.23 cw(c12.12,2065.23) -12.03,2089.37 -11.32,2090.08 cw(c59.4,2019.37) 59.4,2119.37 72.97,2119.37 126.94,2119.37 ccw(c126.94,2164.83) 149.18,2125.18 ccw(c126.94,2164.83) 159.09,2132.69 cw(c214.4,2049.37) 214.4,2149.37 246.13,2149.37 467.97,2149.37 545.34,2149.37 583.08,2149.37 cw(c583.08,2084.94) 614.19,2141.36 ; J2.7@612.38,78.29 J2.7 ; 614.19,2141.36 ccw(c669.48,2199.87) 628.64,2130.5 ; 614.19,2141.36 cw(c583.08,2084.94) 628.64,2130.5
  Bottom w20: J2.8 227.13,118.53 265.93,157.32 J2.6
  other v1: 292.97,69.37 512.97,69.37 62.97,179.37 702.97,244.37 17.97,514.37 807.97,619.37 -17.03,1279.37 807.97,1309.37 807.97,1939.37 -17.03,1944.37 72.97,2114.37 737.97,2114.37 467.97,2144.37
H_LED: ES21.2 IC1.22 LED9.2 | length 163.8
  Top w10: LED9.2 605.73,576.89 ES21.2 605.37,677.26 605.37,704.63 v1(605,705)
L_LED: ES20.2 IC1.15 LED8.2 | length 251.9
  Top w10: LED8.2 235.73,576.89 ES20.2 235.73,746.89 v1(265.73,776.89)
  Bottom w10: v1(265.73,776.89) v1@268.63,773.99
LED_Alarm: ES8.2 IC1.1 LED6.2 | length 1034.1
  Top w10: v1(72.97,697.22) 72.97,539.37 117.97,494.37 117.97,354.37 ES8.2 152.97,319.37 212.97,319.37 313.25,319.37 420.73,211.89 LED6.2
  Bottom w10: v1(72.97,697.22) 373.77,697.22
LED_Ato_1: ES3.2 IC1.9 LED1.2 | length 1656.4
  Top w10: LED1.2@13.05,2059.57 105.73,1966.89 ES3.2 140.73,1821.89 140.73,1761.89 175.73,1726.89 634.02,1726.89 668.97,1691.93 668.97,1111.43 665,1107.45 v1(665,945)
LED_Ato_2: ES4.2 IC1.10 LED2.2 | length 1499.1
  Top w10: LED2.2 230.73,1996.89 245.73,1981.89 ES4.2 360.73,1746.89 642.3,1746.89 687.97,1701.22 687.97,980 695,972.98 v1(695,955)
LED_Ato_3: ES5.2 IC1.11 LED3.2 | length 1430.4
  Top w10: LED3.2 420.73,2016.89 435.73,2001.89 ES5.2 480.73,1816.89 480.73,1796.89 510.73,1766.89 650.59,1766.89 707.97,1709.5 707.97,988.29 720.73,975.53 720.73,925.86 714.88,920 v1(690,920)
LED_Ato_4: ES6.2 IC1.12 LED4.2 | length 1317.5
  Top w10: LED4.2 610.73,2001.89 620.73,1991.89 ES6.2 647.97,1834.65 647.97,1797.79 727.97,1717.79 727.97,996.57 740.73,983.81 740.73,915.73 701.64,876.64 693.36,876.64 v1(680,890)
LED_Ato_5: ES7.2 IC1.13 LED5.2 | length 1249.2
  Top w10: v1(685,855) 720.73,855 722.87,852.87 760.73,890.73 760.73,992.1 747.97,1004.86 747.97,1714.37 775.73,1742.13 775.73,1851.89 ES7.2 750.73,1982.01 LED5.2
LED_Normal: ES12.2 IC1.26 LED7.2 | length 571.8
  Top w10: LED7.2 457.97,179.13 457.97,369.37 488.97,400.37 488.97,683.97 v1(490,685)
NEBST: B5.1 ESD1.1 J2.4 T11.1 | length 357.4
  Top w15: ESD1.1 v1@315.47,101.87
  Bottom w15: B5.1 310.73,321.89 T11.1 364.35,268.27 J2.4 364.35,145.75 v1(317.97,99.37)
NetB1_1: B1.1 L1.2 | length 81.6
  Bottom w30: L1.2 81.44,1907.84 B1.1
NetB2_1: B2.1 L1.3 | length 73.2
  Bottom w30: L1.3 242.34,1863.74 B2.1
NetB3_2: B3.2 C4.1 ES13.2 ES14.1 L1.1 L2.2
  other v1: 27.97,1674.37 77.97,1674.37 22.97,1719.37
NetB4_2: B4.2 R17.2 | length 70
  Bottom w15: B4.2 R17.2
NetB5_2: B5.2 R19.2 | length 70
  Bottom w15: B5.2 R19.2
NetB6_2: B6.2 R21.2 | length 70
  Bottom w15: B6.2 R21.2
NetB7_1: B7.1 C10.1 C14.1 Q3.3 T6.1 | length 160.1
  Top w20: C14.1 627.97,274.37 v1(647.97,294.37)
  Bottom w20: 487.97,429.37 523.25,429.37 ; C10.1 607.97,334.37 v1(647.97,294.37)
NetB10_1: B10.1 R27.2 U2.8 | length 192.4
  Bottom w15: 725.73,1381.89 726.73,1382.89 B10.1
  Bottom w40: B10.1 755.73,1475.89 R27.2
NetB10_2: B10.2 Q1.4 Q1.7
NetC4_2: C4.2 ES14.2 ES17.1 L1.4 L2.1 Q1.1 Q1.2 Q1.5 Q1.6 Q1.8 T13.1 | length 61.3
  Bottom w30: T13.1 cw(c307.8,1689.82) 307.8,1706.89 ES17.1
  other v1: 272.97,1614.37 187.97,1674.37 252.97,1674.37
NetC7_1: C7.1 R22.1 R23.2 | length 120
  Bottom w20: R23.2 R22.1
NetES2_1: ES2.1 R2.1 SW2.2 | length 155
  Top w15: R2.1 ES2.1 496.91,1295.43 SW2.2
NetJ1_3: J1.3 R10.1 | length 109.9
  Bottom w15: R10.1@535.31,1993.74 R10.1@536.71,1992.35
  Bottom w30: J1.3 488.77,1991.89 R10.1
NetJ2_1: J2.1 Q3.2 | length 115.8
  Bottom w30: Q3.2@455.73,311.89 458.31,311.89 511.99,258.22 J2.1
NetL3_2: L3.2 SD1.1 U3.1 | length 515.8
  Bottom w50: L3.2@57.88,1116.34 105.14,1163.59 298.63,1163.59 365.33,1096.89 460.73,1096.89 478.88,1078.74 U3.1@478.88,1038.7
NetLED1_1: LED1.1 R3.2 | length 159.9
  Top w15: LED1.1@15.73,2001.77 15.73,1901.61 R3.2
NetLED2_1: LED2.1 R4.2 | length 235
  Top w15: LED2.1 175.62,1862.01 R4.2
NetLED3_1: LED3.1 R5.2 | length 259.1
  Top w15: R5.2 365.62,1871.77 LED3.1
NetLED4_1: LED4.1 R6.2 | length 239.1
  Top w15: R6.2 555.62,1871.77 LED4.1
NetLED5_1: LED5.1 R7.2 | length 228.5
  Top w15: R7.2 692.97,1989.37 767.97,2064.37 LED5.1 ; R7.2@700.73,1876.89 R7.2@700.73,1879.37
NetLED6_1: LED6.1 R8.2 | length 163.9
  Top w10: R8.2 278.14,289.37 LED6.1
NetLED7_1: LED7.1 R9.2 | length 169.8
  Top w10: R9.2 288.33,229.37 365.62,152.08 LED7.1
NetLED8_1: LED8.1 R14.2 | length 158.1
  Top w15: LED8.1 273.14,434.37 R14.2
NetLED9_1: LED9.1 R15.2 | length 130.2
  Top w15: R15.2 580.73,401.89 LED9.1
NetQ1_3: Q1.3 R16.2 R20.2
NetQ2_1: Q2.1 R12.2 R21.1 T9.1 | length 225.6
  Bottom w15: R12.2 177.97,379.37 190.47,391.87 Q2.1 190.47,456.63 R21.1 T9.1 T9.1@245.73,566.89
NetQ3_1: Q3.1 R28.2 | length 75.7
  Bottom w15: Q3.1@533.23,312.89 533.23,304.39 R28.2
NetR22_2: R22.2 U2.5
NetR25_1: R25.1 R29.1 U3.3 | length 153.2
  Bottom w15: U3.3 538.33,954.49 R25.1 R29.1
P+: B1.2 ES9.2 ES11.1 J1.1 T14.1 | length 278
  Bottom w30: B1.2 ES9.2 T14.1 328.21,1934.37 ES11.1 ; ES11.1@346.52,1952.68 J1.1
P-: B2.2 ES10.1 ES11.2 J1.2 T15.1 | length 245.2
  Bottom w30: B2.2 342.97,1864.37 ccw(c342.97,1876.44) 351.51,1867.91 T15.1 392.97,1909.37 ccw(c386.31,1916.03) 395.73,1916.03 ES11.2 J1.2
PlugInCheck: IC1.27 R17.1 T8.1 | length 483.8
  Top w10: v1(415.73,551.89) 460,596.16 v1(460,680)
  Bottom w10: T8.1 209.81,722.81 404.49,722.81 435.78,691.51 445.78,691.51 457.29,680 v1(460,680) ; R17.1 v1(415.73,551.89)
PWM: IC1.8 R16.1 T1.1 | length 785.5
  Top w10: v1(470,913.49) 536.28,979.77 543.61,979.77 607.97,1044.13 v1(607.97,1504.37)
  Bottom w10: T1.1 T1.1@373.28,878.28 ; v1(607.97,1504.37) 665.73,1562.13 R16.1
RESET: C16.2 IC1.5 J3.5
STA: IC1.28 R19.1 T3.1 | length 391.1
  Top w10: v1(365.73,566.89) 422.49,623.64 422.49,752.51 v1(375,800)
  Bottom w10: R19.1 v1(365.73,566.89) ; T3.1 343.83,798.83 353.92,798.83 355.1,800 v1(375,800)
SW_AD: C3.2 IC1.7 R2.2 | length 483.1
  Top w10: R2.2 377.97,1289.37 377.97,1134.37 477.97,1034.37 477.97,957.97 v1(425,905)
SWCLK: IC1.21 J3.2 R1.2 R18.1
SWDIO: IC1.20 J3.4 R13.1
VCC: B7.2 C8.1 C11.1 C15.1 C?.2@1060,735 ESD2.1 ESD2.2 IC?.1 IC?.3 L3.1 R3.1 R4.1 R5.1 R6.1 R7.1 R8.1 R9.1 R11.2 R14.1 R15.1 T4.1 T7.1 U3.4 U3.5 | length 3207.3
  Top w15: R9.1 v1(187.97,259.37) R8.1 ; C15.1 605.73,309.37 R15.1 ; v1(692.97,1789.37) R7.1@692.97,1834.37
  Top w20: R3.1 72.97,1794.37 v1(72.97,1769.37) ; R4.1 175.73,1786.89 205.73,1756.89 v1(310.73,1756.89) ; R11.2 267.97,374.37 v1(277.97,374.37) 332.97,374.37 R14.1 ; R5.1 380.73,1811.89 390.73,1821.89 v1(390.73,1831.89) ; R6.1 565.73,1811.89 580.73,1826.89 v1(580.73,1831.89) ; R15.1 617.97,389.13 v1(617.97,469.37)
  Inner Layer 2 w10: v1(313.56,671.11) 313.85,671.11 349.86,671.11
  Inner Layer 2 w15: 179.28,1087.91 226.26,1134.89 ; v1(237.97,939.37) 208.52,939.37 179.28,968.6 250.19,968.6 313.85,904.94 313.85,695.45 ; 305.73,327.35 310.73,332.35 310.73,657.99 305.73,662.99 313.85,671.11 313.85,695.45 ; v1(313.56,671.11) 313.85,695.45 ; 702.18,1794.37 702.18,1477.03 722.62,1456.59 722.62,1189.45 676.18,1143.01 674.14,1140.98 722.06,1093.05
  Inner Layer 2 w20: 676.18,1143.01 711.56,1143.01
  Bottom w10: L3.1@17.09,959.22 56.28,959.22 57.88,960.82 247.26,960.82 247.32,960.76 237.97,951.42 223.73,937.18
  Bottom w15: 247.32,960.76 248.84,959.24
  Bottom w20: v1(237.97,939.37) 237.97,951.42 237.97,951.54 247.26,960.82 ; C11.1@575.73,521.89 C11.1 570.73,516.61 593.97,493.37 595.84,493.37 617.97,471.24 v1(617.97,469.37)
  Bottom w30: T4.1 L3.1@180.73,931.89 ; v1@311.73,637.89 414.73,637.89 490.73,561.89 545.73,561.89 575.73,531.89 C11.1@575.73,521.89
  other v1: 310.73,591.89 310.73,636.89 237.97,974.37
VCC3V3_MCU: C5.2 C6.2 C?.2@1067.4,970 IC1.3 IC?.5
VCC15V0_DRV: B3.1 C9.1 C12.1 C13.1 R29.2 SD1.2 T5.1 | length 397.8
  Top w20: v1(215.73,1361.89) C13.1
  Bottom w10: C12.1@418.15,1328.95 C12.1@419.61,1330.41
  Bottom w20: C9.1 565.73,1326.89 585.73,1306.89 585.73,1131.89 615.73,1101.89 R29.2
pads on no net: IC1.6 IC1.16 IC1.17 IC1.18 IC1.19 IC1.23 IC1.24 IC1.25 IC?.4 MARK1.0 MARK2.0 SW2.3 SW2.4 U2.4 U3.6
copper on no net: | length 473.8
  Top w15: v1(247.97,814.37) 320.63,814.37 392.97,742.03 392.97,719.37 337.97,719.37 297.97,719.37 282.97,704.37 v1(282.97,544.37)

## Polygon pours and split planes (outlines as drawn)
VCC on Bottom "B_+5V" (solid, remove dead copper, pour order 1006): 585.73,661.89 285.73,661.89 265.73,641.89 265.73,601.89 285.73,581.89 300.73,566.89 320.73,566.89 325.73,566.89 355.73,596.89 360.73,601.89 430.73,601.89 445.73,586.89 445.73,551.89 465.73,531.89 520.73,531.89 540.73,511.89 595.73,456.89 635.73,456.89 635.73,501.89 610.73,526.89 610.73,531.89 610.73,636.89 585.73,661.89
GND on Bottom "B_GND" (solid, remove dead copper, shelved, pour order 1012): -202.03,2329.37 -202.03,-100.63 -197.03,-105.63 977.97,-105.63 977.97,2329.37
GND on Top "T_GND" (solid, remove dead copper, shelved, pour order 1014): -257.03,2304.37 -257.03,29.37 -97.03,-130.63 832.97,-130.63 932.97,-30.63 927.97,-25.63 927.97,2339.37 912.97,2354.37 -197.03,2354.37 -207.03,2354.37 -257.03,2304.37
VCC on Inner Layer 2 "IN2_+5V" (solid, remove dead copper, shelved, pour order 1016): 52.97,1829.37 52.97,1734.37 597.97,1734.37 662.97,1669.37 662.97,1214.37 617.97,1169.37 322.97,1169.37 232.97,1169.37 157.97,1094.37 157.97,939.37 202.97,894.37 277.97,819.37 277.97,494.37 277.97,389.37 157.97,269.37 212.97,214.37 362.97,364.37 362.97,439.37 362.97,904.37 257.97,1009.37 257.97,1069.37 277.97,1089.37 632.97,1089.37 677.97,1044.37 687.97,1034.37 687.97,579.37 747.97,579.37 747.97,1759.37 677.97,1829.37
GND on Inner Layer 2 "IN2_GND" (solid, remove dead copper, shelved, pour order 1024): 592.97,2104.37 ccw(c617.12,2128.51) 617.12,2094.37 687.97,2094.37 711.55,2094.37 cw(c711.55,1994.37) 782.26,2065.08 787.97,2059.37 787.97,575.79 cw(c687.97,575.79) 758.68,505.08 742.97,489.37 712.26,458.66 ccw(c782.97,387.95) 682.97,387.95 682.97,264.37 682.97,175.79 cw(c582.97,175.79) 653.68,105.08 642.97,94.37 cw(c630.9,106.44) 630.9,89.37 542.97,89.37 184.4,89.37 cw(c184.4,189.37) 113.68,118.66 102.97,129.37 cw(c151.26,177.65) 82.97,177.65 82.97,249.37 82.97,448.16 ccw(c31.76,448.16) 67.97,484.37 32.26,520.08 cw(c102.97,590.79) 2.97,590.79 2.97,594.37 2.97,2043.16 cw(c54.19,2043.16) 17.97,2079.37 cw(c54.19,2043.16) 54.19,2094.37 87.97,2094.37 131.76,2094.37 ccw(c131.76,2145.58) 167.97,2109.37 cw(c192.12,2085.23) 192.12,2119.37 222.97,2119.37 556.76,2119.37 cw(c556.76,2068.16) 592.97,2104.37
GND on Inner Layer 3 "IN3_GND" (solid, remove dead copper, shelved, pour order 1026): 672.97,2094.37 734.69,2094.37 cw(c734.69,2026.09) 782.97,2074.37 cw(c770.9,2062.3) 787.97,2062.3 787.97,2019.37 787.97,575.79 cw(c687.97,575.79) 758.68,505.08 737.97,484.37 712.26,458.66 ccw(c782.97,387.95) 682.97,387.95 682.97,289.37 682.97,175.79 cw(c582.97,175.79) 653.68,105.08 637.97,89.37 552.97,89.37 184.4,89.37 cw(c184.4,189.37) 113.68,118.66 112.97,119.37 112.26,120.08 cw(c182.97,190.79) 82.97,190.79 82.97,329.37 82.97,427.95 ccw(c-17.03,427.95) 53.68,498.66 32.97,519.37 32.26,520.08 cw(c102.97,590.79) 2.97,590.79 2.97,654.37 2.97,2043.16 cw(c54.19,2043.16) 17.97,2079.37 cw(c54.19,2043.16) 54.19,2094.37 107.97,2094.37 122.62,2094.37 ccw(c122.62,2179.73) 182.97,2119.37 cw(c195.05,2107.3) 195.05,2124.37 267.97,2124.37 571.76,2124.37 cw(c571.76,2073.16) 607.97,2109.37 ccw(c644.19,2145.58) 644.19,2094.37 672.97,2094.37

## Keep-outs
Keep-Out Layer:
  the board outline again, w0.5

## Other copper
Top:
  rectangle net GND_S: 677.97,234.37 707.97,254.37
  rectangle net NetB3_2: 17.97,1509.37 92.97,1734.37
  rectangle net NetC4_2: 132.97,1504.37 277.97,1688.79
  rectangle net GND_S: -27.03,1259.37 -12.03,1299.37
  rectangle net VCC: 302.97,624.37 397.97,679.37
  rectangle net GND: 602.97,124.37 677.97,209.37
  rectangle net GND: 102.97,119.37 192.97,204.37
  rectangle net GND: 477.97,299.37 562.97,354.37
  rectangle net GND: 412.97,969.37 442.97,1034.37
Bottom:
  rectangle net NetC4_2: 157.97,1474.37 327.97,1734.37
  rectangle net NetB3_2: 7.97,1384.37 102.97,1739.37
  rectangle net GND_S: -27.03,1259.37 -12.03,1299.37
  rectangle net GND: 447.97,139.37 532.97,174.37
  rectangle net GND_S: 130.73,56.24 200.73,101.89
  rectangle net GND_S: 580.73,55.41 645.73,96.89
  rectangle net GND_S: 692.97,329.37 727.97,434.37
  rectangle net NetB7_1: 427.97,374.37 587.97,474.37
  rectangle net NetB7_1: 567.97,314.37 637.97,389.37
  rectangle net VCC15V0_DRV: 72.97,1284.37 207.97,1329.37
  rectangle net VCC: 167.97,589.37 313.56,671.11
  rectangle net VCC: 296.94,641.76 427.97,669.37
  rectangle net GND: 382.97,1164.37 552.97,1259.37
  rectangle net GND: 417.97,969.37 437.97,1034.37
  region net GND_S: 727.97,319.37 707.97,299.37 707.97,324.37 712.97,329.37 727.97,329.37
  region net VCC15V0_DRV: 597.97,1286.22 182.97,1286.22 182.97,1370.08 597.97,1370.08
  region net VCC: 2.41,1012.11 174.73,1012.05 196.34,990.44 342.89,990.44 356.55,1004.1 384.22,1004.1 391.88,996.44 391.88,947.94 385.17,941.23 312.36,941.23 290.65,919.52 2.41,919.52

## Silkscreen, mask and mechanical layers (free items; w line width, h text height)
Silkscreen Bottom:
  lines w5: 420.73,121.89 420.73,131.89 ; 430.73,131.89 420.73,131.89 ; 520.73,116.89 435.73,116.89 420.73,131.89
  text "DRY+" at 365.73,2196.89 h35 r90
  text "DRY-" at 410.73,2196.89 h35 r90
  text "Earth" at 455.73,2196.89 h35 r90
  text "Earth" at 267.97,124.37 h25 r90
  text "EN" at 302.97,119.37 h25 r90
  text "GND" at 475.73,111.89 h25 r90
  text "VCC" at 525.73,111.89 h25 r90
  text "NC" at 437.97,109.37 h25 r90
  text "STA" at 382.97,104.37 h25 r90
Assembly Drawing Top:
  the board outline again, w0.5
Layer_14:
  drawing of 219 lines, arcs and shapes, not listed